# EAGLE board Teensy + XBee (EAGLE 9.6.1)
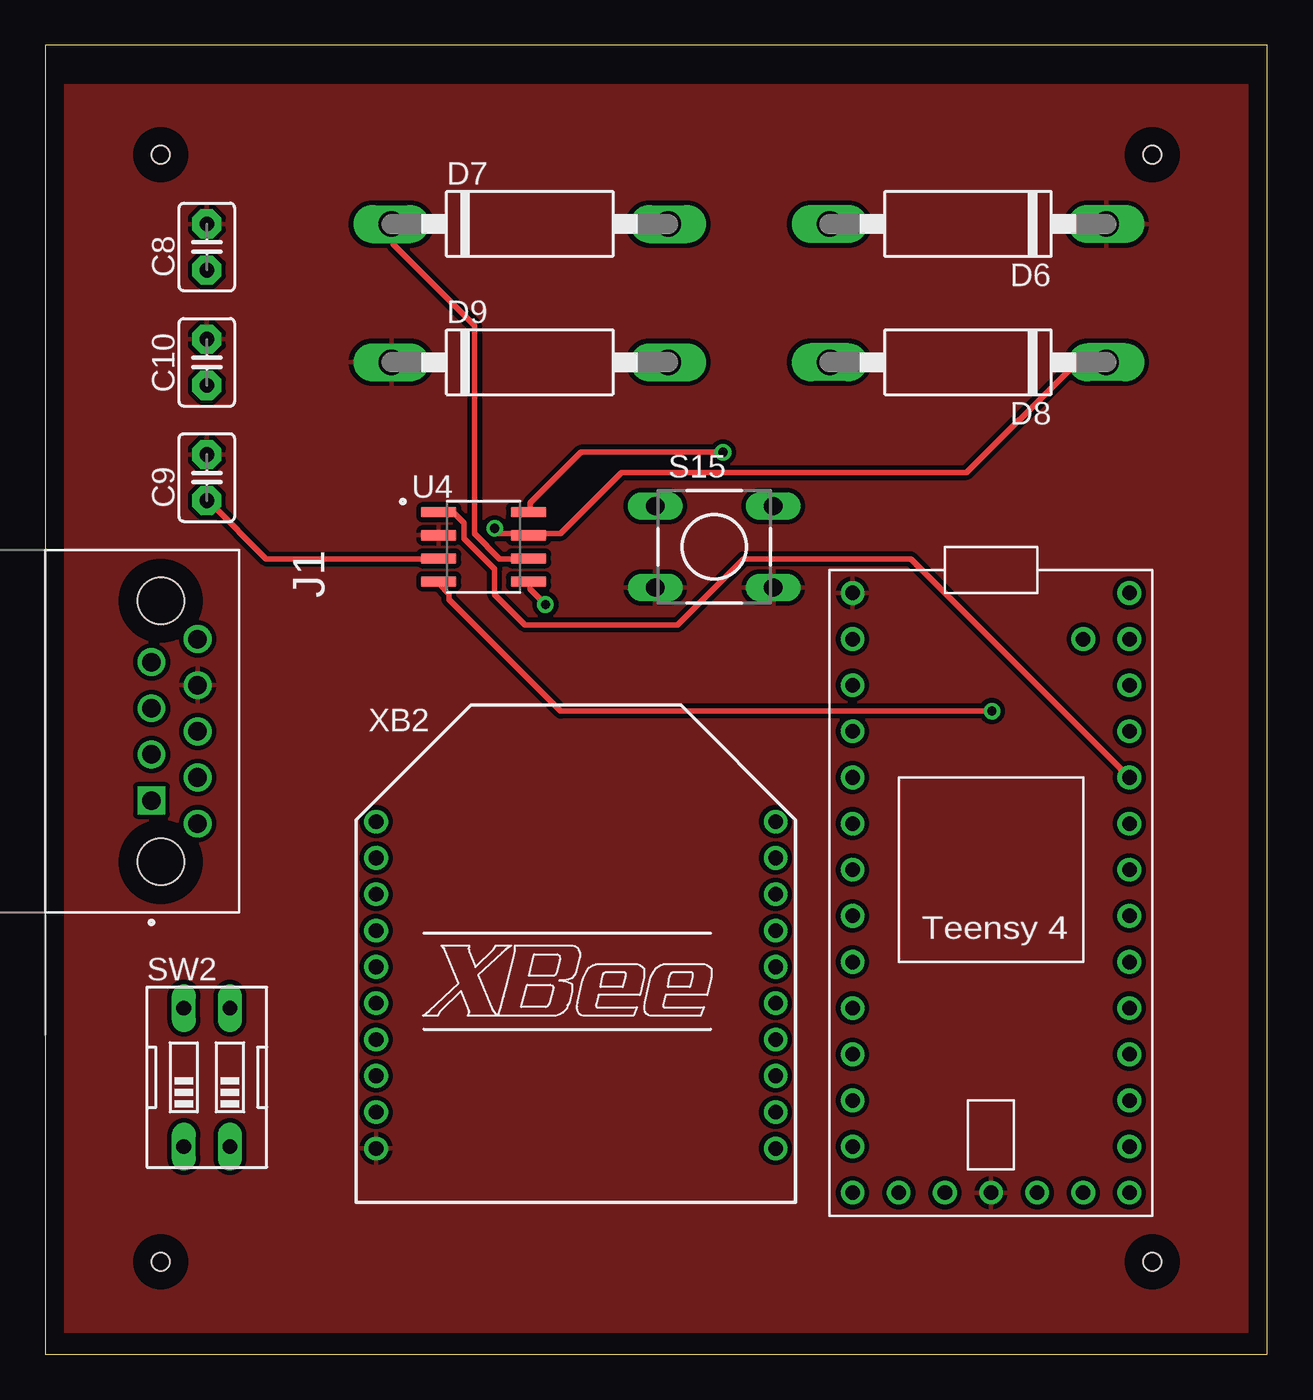
[diagram p0: board, top side]
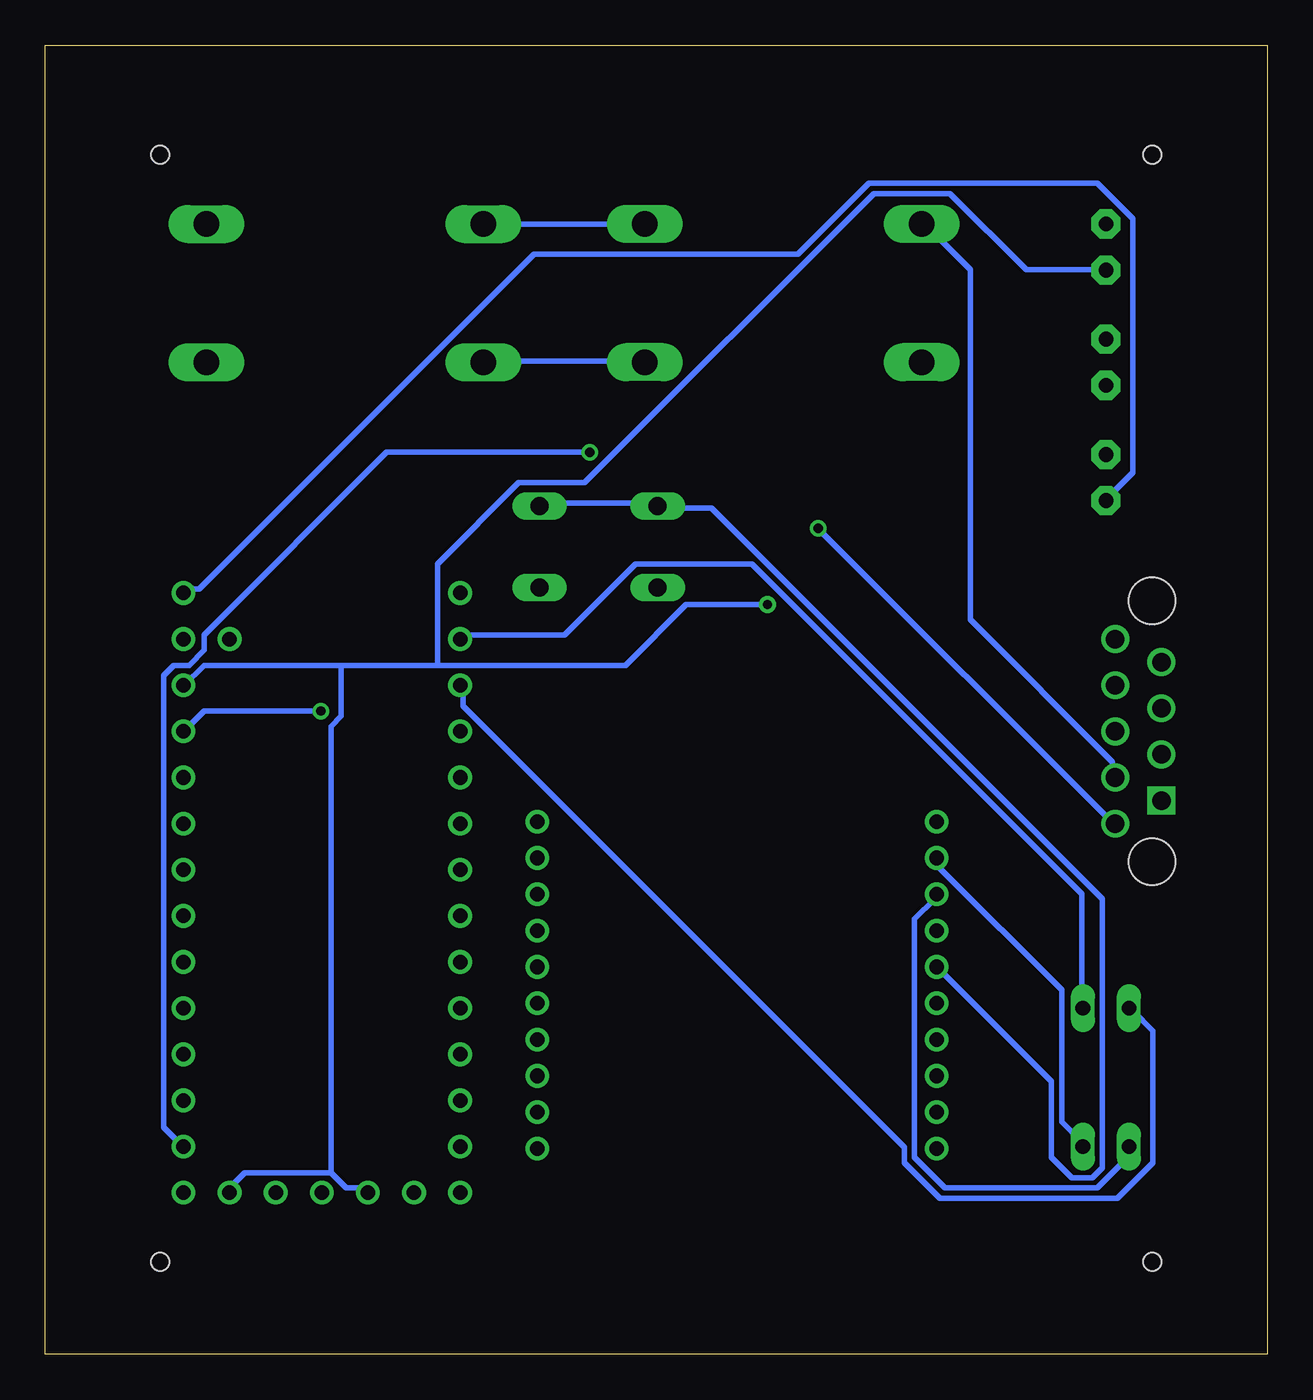
[diagram p1: board, bottom side, seen from below]

Size 67.29 x 72.06 mm. Coordinates in mm from the lower left corner, seen from the top.
Outline: 0,0 67.29,0 67.29,72.06 0,72.06 0,0
Copper layers (1*16): Top 0.035mm / dielectric 1.5mm / Bottom 0.035mm
Design rules "default": minimum track width 6mil, minimum drill 0.35mm, track to track 6mil, track to pad 6mil, pad to pad 6mil, via to via 6mil, smd to smd 6mil, copper to edge 40mil, drill to drill 6mil, minimum pad ring 10mil, minimum via ring 8mil, stop-mask expansion 4mil, vias tented up to drill 0mil, thermal gap 10mil
Net classes: 0 default: width 0.305 mm, drill 0.508 mm, clearance 0.254 mm
Holes 1 mm at 6.35,66.04 60.96,66.04 6.35,5.08 60.96,5.08

## Footprints (pad centres in the part's own frame; a part is rotated, then mirrored left to right if it is on the bottom)
C2.5-3 = drill 0.813 pad 1.6 octagon: 1 -1.27,0; 2 1.27,0
C1702-15 = drill 1.397 long: A 7.62,0; C -7.62,0
BEL_M83513/10-A01NP = drill 1.02 square: 1 3.81,-0.508 | drill 1.02: 2 1.27,-0.508; 3 0,2.032; 4 -1.27,-0.508; 5 -3.81,-0.508; 6 5.08,2.032; 7 2.54,2.032; 8 -2.54,2.032; 9 -5.08,2.032 | hole 2.57: -7.188,0; 7.188,0
DTS-6 = drill 1 long: 1 -3.25,2.25; 2 3.25,2.25; 3 -3.25,-2.25; 4 3.25,-2.25
EDG-02 = drill 0.813 long: 1 -1.27,-3.81; 2 1.27,-3.81; 3 1.27,3.81; 4 -1.27,3.81
SOIC127P600X175-8N = smd 1.97 x 0.59: 1 -2.475,1.905; 2 -2.475,0.635; 3 -2.475,-0.635; 4 -2.475,-1.905; 5 2.475,-1.905; 6 2.475,-0.635; 7 2.475,0.635; 8 2.475,1.905
TEENSY4.0 = drill 0.8: 3.3V@1 7.62,10.16; 3.3V@2 -2.54,-17.78; AGND 7.62,12.7; D0 -7.62,12.7; D1 -7.62,10.16; D2 -7.62,7.62; D3 -7.62,5.08; D4 -7.62,2.54; D5 -7.62,0; D6 -7.62,-2.54; D7 -7.62,-5.08; D8 -7.62,-7.62; D9 -7.62,-10.16; D10 -7.62,-12.7; D11 -7.62,-15.24; D12 -7.62,-17.78; D13/LED 7.62,-17.78; D14/A0 7.62,-15.24; D15/A1 7.62,-12.7; D16/A2 7.62,-10.16; D17/A3 7.62,-7.62; D18/A4 7.62,-5.08; D19/A5 7.62,-2.54; D20/A6 7.62,0; D21/A7 7.62,2.54; D22/A8 7.62,5.08; D23/A9 7.62,7.62; GND@1 -7.62,15.24; GND@2 0,-17.78; ON/OFF 5.08,-17.78; PROGRAM 2.54,-17.78; VBAT -5.08,-17.78; VIN 7.62,15.24; VUSB 5.08,12.7
XBEE = drill 0.8 pad 1.27: 1 -11,9; 2 -11,7; 3 -11,5; 4 -11,3; 5 -11,1; 6 -11,-1; 7 -11,-3; 8 -11,-5; 9 -11,-7; 10 -11,-9; 11 11,-9; 12 11,-7; 13 11,-5; 14 11,-3; 15 11,-1; 16 11,1; 17 11,3; 18 11,5; 19 11,7; 20 11,9

## Placement (x,y rotation side)
C8  [C2.5-3]  8.89,60.96 90 top
C9  0.1uF  [C2.5-3]  8.89,48.26 90 top
C10  4.7nF  [C2.5-3]  8.89,54.61 90 top
D6  1N5333  [C1702-15]  50.8,62.23 180 top
D7  1N5333  [C1702-15]  26.67,62.23 0 top
D8  1N5333  [C1702-15]  50.8,54.61 180 top
D9  1N5333  [C1702-15]  26.67,54.61 0 top
J1  M83513/10-A01NP  [BEL_M83513/10-A01NP]  6.35,34.29 270 top
S15  DTS-6  [DTS-6]  36.83,44.45 0 top
SW2  [EDG-02]  8.89,15.24 0 top
U4  MAX13054ASA  [SOIC127P600X175-8N]  24.13,44.45 0 top
U$6  TEENSY4.0  [TEENSY4.0]  52.07,26.67 0 top
XB2  XBEE  [XBEE]  29.21,20.32 0 top

## Library data of the parts
C8-C10 = capacitor-wima
D6-D9 = diode
J1 = M83513_10-A01NP; AVAILABILITY: Unavailable; DESCRIPTION: MIL-DTL-83513 PCB Mounted Connector | Plug | 9 Positions | Shell Finish - Nickel | Male | PCB Solder Pins | 0.109 (2.77 mm) Pin Length | Jackpost Attached; MF: Cinch Connectivity Solutions; MP: M83513/10-A01NP; PACKAGE: None; PRICE: None
S15 = switch-tact
SW2 = special
U4 = MAX13054ASA; DESCRIPTION: 1/1 Transceiver Full CANbus 8-SOIC; DIGI-KEY_PART_NUMBER: MAX13054ASA+TTR-ND; DIGI-KEY_PURCHASE_URL: https://www.digikey.com/product-detail/en/maxim-integrated/MAX13054ASA-T/MAX13054ASA-TTR-ND/1475460?utm_source=snapeda&utm_medium=aggregator&utm_campaign=symbol; MF: Maxim Integrated; MP: MAX13054ASA+; PACKAGE: SOIC-8 Maxim
U$6 = Teensy4.0
XB2 = maxstream; MPN: XBP24-Z7UIT-004; OC_FARNELL: 1751799; OC_NEWARK: 34R5507

## Nets
+3V3: C8.1 U4.5 U$6.3.3V@1 U$6.3.3V@2 U$6.ON/OFF
CAN_BUS: D8.C J1.6 U4.7
GND: C8.2 C9.2 C10.2 D6.C D9.C J1.8 S15.3 S15.4 U4.2 U$6.GND@1 U$6.GND@2 XB2.10
N$3: D7.C J1.7 U4.6
N$40: U4.8 U$6.D14/A0
N$41: U4.4 U$6.D23/A9
N$42: U4.1 U$6.D22/A8
N$43: C10.1
N$44: D6.A D7.A
N$45: D8.A D9.A
RESET: S15.1 S15.2 XB2.5
UART_RX: SW2.3 U$6.D0
UART_TX: SW2.4 U$6.D1
V33: XB2.1
VCC: C9.1 U4.3 U$6.VIN
VSS: U$6.VBAT
VUSB: U$6.VUSB
XBEE_IN: SW2.1 XB2.3
XBEE_OUT: SW2.2 XB2.2

## Tracks (layer width: path | path; a pad name or v marks a point on that pad's centre or on a via)
+3V3  (via drill 0.51)
  Top 0.305: v27.53,41.27 26.7,42.11 26.7,42.39 U4.5
  Bottom 0.305: 51.56,9.98 50.72,9.14 49.61,9.14 U$6.3.3V@2 | 51.56,9.98 56.31,9.98 57.15,9.14 U$6.ON/OFF | v27.53,41.27 32,41.27 35.36,37.92 45.7,37.92 | 51,37.92 58.55,37.92 59.67,36.8 U$6.3.3V@1 | 51,37.92 45.7,37.92 | 45.7,37.92 45.7,43.51 41.22,47.98 37.59,47.98 21.67,63.91 17.47,63.91 13.28,59.72 9.09,59.72 C8.1 | 51.56,9.98 51.56,34.57 51,35.13 51,37.92
CAN_BUS  (via drill 0.51)
  Top 0.305: v24.74,45.47 25.02,45.19 26.42,45.19 U4.7 26.7,45.19 28.37,45.19 31.72,48.54 50.72,48.54 56.59,54.41 58.27,54.41 D8.C
  Bottom 0.305: v24.74,45.47 8.53,29.26 J1.6
GND
  pour Top: -1.27,69.85 -1.27,1.27 68.58,1.27 68.58,69.85
N$3
  Top 0.305: U4.6 26.42,43.79 25.02,43.79 23.62,45.19 23.62,56.64 19.15,61.11 19.15,62.23 D7.C
  Bottom 0.305: J1.7 8.53,31.77 8.53,32.61 16.36,40.44 16.36,59.72 18.87,62.23 D7.C
N$40  (via drill 0.51)
  Top 0.305: v37.31,49.66 29.49,49.66 26.7,46.86 26.7,46.58 U4.8
  Bottom 0.305: v37.31,49.66 48.49,49.66 58.55,39.6 58.55,38.76 59.39,37.92 60.22,37.92 60.78,37.36 60.78,12.5 59.94,11.66 U$6.D14/A0
N$41  (via drill 0.51)
  Top 0.305: v52.12,35.41 28.37,35.41 22.22,41.55 22.22,41.83 21.67,42.39 U4.4
  Bottom 0.305: v52.12,35.41 58.55,35.41 59.67,34.29 U$6.D23/A9
N$42
  Top 0.305: U$6.D22/A8 47.65,43.79 38.43,43.79 34.8,40.16 26.42,40.16 24.74,41.83 24.74,43.23 23.06,44.91 23.06,45.75 22.5,46.3 21.67,46.3 U4.1
N$44
  Bottom 0.305: D6.A D7.A
N$45
  Bottom 0.305: D9.A 34.52,54.69 43.18,54.69 D8.A
RESET
  Bottom 0.305: XB2.5 18.03,21.16 11.89,15.01 11.89,10.82 10.77,9.7 9.65,9.7 9.09,10.26 9.09,25.07 30.61,46.58 33.4,46.58 S15.1 33.68,46.86 39.83,46.86 S15.2
UART_RX
  Bottom 0.305: U$6.D0 44.3,39.6 38.71,39.6 34.8,43.51 28.37,43.51 10.21,25.35 10.21,19.2 SW2.3
UART_TX
  Bottom 0.305: U$6.D1 44.3,36.8 44.3,35.69 19.99,11.38 19.99,10.54 18.03,8.58 8.26,8.58 6.3,10.54 6.3,17.8 7.42,18.92 SW2.4
VCC
  Top 0.305: U4.3 21.39,43.79 12.17,43.79 9.09,46.86 C9.1
  Bottom 0.305: U$6.VIN 59.67,42.11 58.83,42.11 40.39,60.55 25.86,60.55 21.95,64.47 9.37,64.47 7.42,62.51 7.42,48.54 8.81,47.14 C9.1
XBEE_IN
  Bottom 0.305: XB2.3 18.31,25.07 19.43,23.95 19.43,10.82 17.75,9.14 9.37,9.14 7.7,10.82 7.7,11.38 SW2.1
XBEE_OUT
  Bottom 0.305: XB2.2 18.03,27.3 18.03,26.75 11.33,20.04 11.33,12.78 10.21,11.66 SW2.2